# Altium PCB CAN2UART.PcbDoc
Units mm, origin at the board's own origin, x right, y up, seen from the top; angles counter-clockwise.
Board outline 70 x 30 mm, 2 copper layers (Top Layer, Bottom Layer); 34 components, 23 nets, 143 pads, 42 vias.
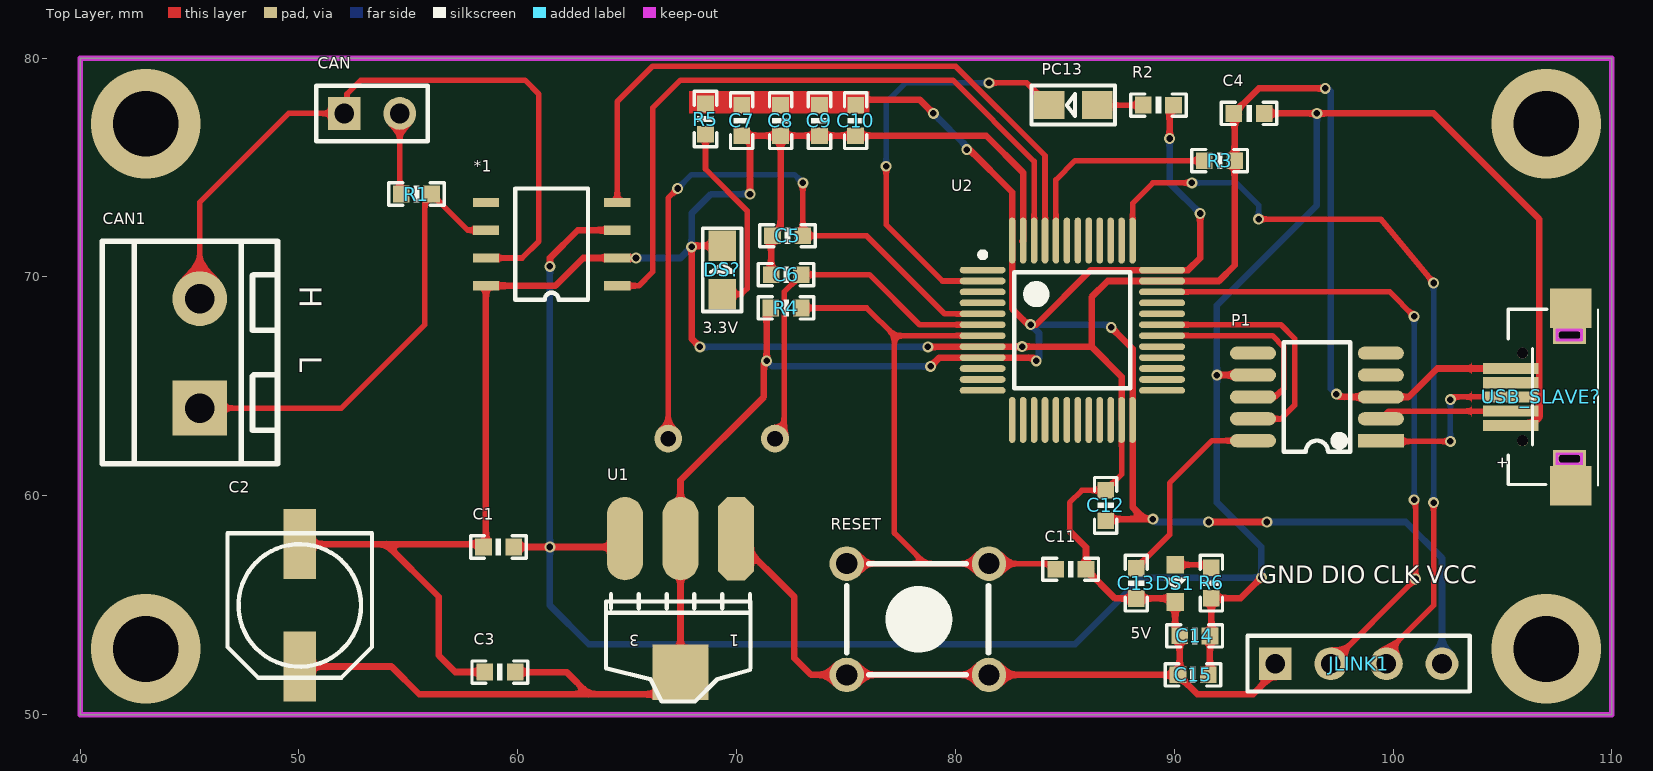
[diagram p0: Top Layer view]
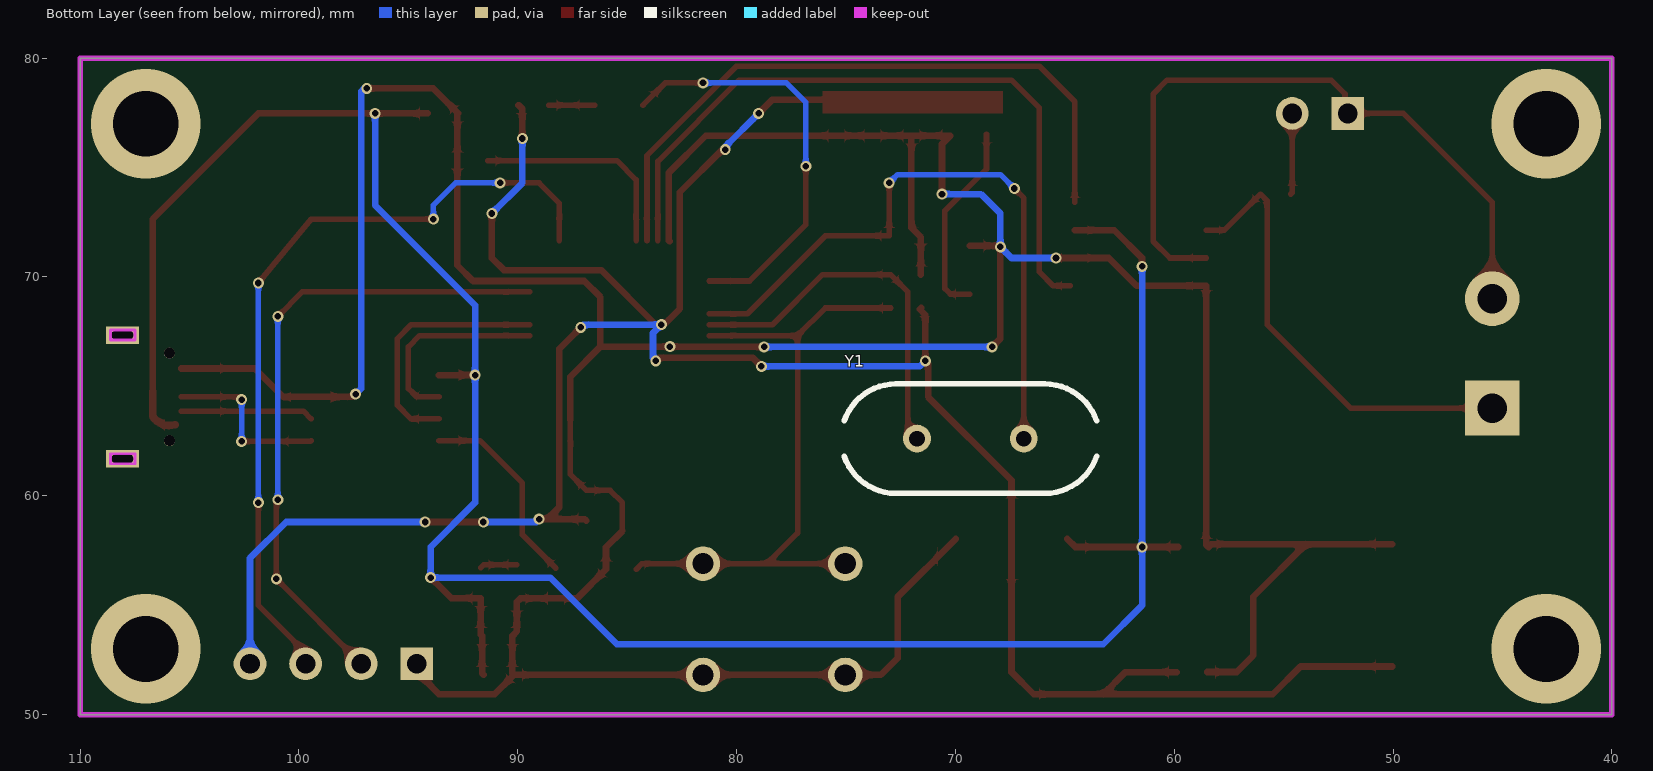
[diagram p1: Bottom Layer view, seen from below]

## Layer stack, top to bottom
Top Solder: solder mask 0.0102, Solder Resist, Dk 3.5
Top Layer: signal copper 0.0356
Dielectric 1: dielectric 0.32, FR-4, Dk 4.8
Bottom Layer: signal copper 0.0356
Bottom Solder: solder mask 0.0102, Solder Resist, Dk 3.5

## Board outline
40,50 40,80 110,80 110,50

## Design rules (kind name [scope] priority, off if disabled: settings)
Clearance [All] p1: gap=0.1
PolygonConnect [All] p1: connectstyle=Relief reliefconductorwidth=0.254 reliefentries=4 polygonreliefangle="90 Angle" airgapwidth=0.254
RoutingVias [All] p1: holewidth=0.711 width=1.27 viastyle="Through Hole" minholewidth=0.711 minwidth=1.27 maxholewidth=0.711 maxwidth=1.27
SolderMaskExpansion [All] p1: expansion=0.102
Width [All] p1: maxlimit=0.5 minlimit=0.254 preferedwidth=0.254
30 further rules are at their usual default settings.

## Classes and differential pairs
component class 5V_3.3V: C1 C2 C3 U1
component class CH340: C13 C14 C15 DS1 P1 R6 USB_SLAVE?
component class MIN-SYS: C5 C6 C7 C8 C9 C10 C11 C12 DS? JLINK1 PC13 R2 R3 R4 R5 RESET U2 Y1
component class TJA1050: *1 C4 CAN CAN1 R1

## Components (designator, comment, footprint, x,y, rotation, side; value= is the part's Value field where it differs from the comment)
*1 "TJA1050" SOP8 64.547,69.596 r180 top
C1 "104" 0603P 59.118,57.66 r0 top
C2 "220uF" CC6.56.5 50.038,54.991 r90 top
C3 "104" 0603P 59.182,51.945 r0 top
C4 "104" 0603P 93.421,77.47 r180 top
C5 "104" 0603P 72.326,71.884 r0 top
C6 "104" 0603P 72.263,70.104 r0 top
C7 "104" 0603P 70.231,77.14 r90 top
C8 "104" 0603P 72.009,77.14 r90 top
C9 "104" 0603P 73.787,77.14 r90 top
C10 "104" 0603P 75.438,77.14 r90 top
C11 "104" 0603P 85.268,56.642 r0 top
C12 "104" 0603P 86.868,59.563 r270 top
C13 "104" 0603P 88.265,56.007 r270 top
C14 "104" 0603P 90.932,53.596 r0 top
C15 "104" 0603P 90.856,51.816 r0 top
CAN "CAN_R" HDR1X2 52.07,77.47 r0 top
CAN1 "CAN" HEAD2L-0.8 45.466,64.008 r90 top
DS1 "CH340E_LED_Power" SMDLED-0603 90.043,56.845 r270 top
DS? "LED3.3V" SMDLED 69.34,69.214 r90 top
JLINK1 "Header 4" HDR1X4 94.615,52.324 r0 top
P1 "CH340E" SOP10 99.441,62.516 r180 top
PC13 "LED1" SMDLED 86.488,77.849 r180 top
R1 "120" 0603P 55.372,73.787 r180 top
R2 "1K" 0603P 89.281,77.851 r180 top
R3 "10K" 0603P 92.075,75.311 r180 top
R4 "10K" 0603P 72.263,68.58 r180 top
R5 "1K" 0603P 68.58,77.216 r270 top
R6 "1K" 0603P 91.694,56.007 r90 top
RESET "KEY_M" KEY_M 75.034,56.896 r0 top (schematic designator RESET?)
U1 "AMS1117-3.3" AMS1117 69.978,58.037 r180 top
U2 "STM32F103C8T6" LQFP48_M 85.344,67.564 r0 top
USB_SLAVE? "USB-B(Mini)" MICRO-USB 107.569,64.516 r90 top
Y1 "8MHz" XTAL_US 71.755,62.611 r180 bottom

## Footprints (in the part's own frame and the unit in brackets; to place one, negate y for a bottom-side part, rotate by r counter-clockwise, add the part's x,y. Pads: shape width x height; smd on the part's side, far side on the other; paste and mask are expansions set on the pad)
0603P [mil]
  rect 30x30 smd: 1(-27,0) 2(27.5,-0.06)
  silkscreen extent -50,-20 50,20
AMS1117 [mil]
  oct 65x150 smd: 1(0.03,-0.06)
  oval 65x150 smd: 2(100.03,-0.06) 3(200.03,-0.06)
  rect 100x100 smd: 4(100.03,239.94)
  silkscreen extent -26,100 234,293
CC6.56.5 [mm]
  rect 3.2x1.5 smd: 1(-2.794,0) 2(2.8,0)
  silkscreen extent -3.3,-3.3 3.3,3.3
HDR1X2 [mm]
  rect 1.5x1.5 hole 0.9: 1(0,0)
  round 1.5 hole 0.9: 2(2.54,0)
  silkscreen extent -1.27,-1.27 3.81,1.27
HDR1X4 [mm]
  rect 1.5x1.5 hole 0.9: 1(0,0)
  round 1.5 hole 0.9: 2(2.54,0) 3(5.08,0) 4(7.62,0)
  silkscreen extent -1.27,-1.27 8.89,1.27
HEAD2L-0.8 [mm]
  rect 2.5x2.5 hole 1.35: 1(0,0)
  round 2.5 hole 1.35: 2(5,0)
  silkscreen extent -2.54,-3.56 7.62,4.45
KEY_M [mil]
  round 62 hole 38: 1(0,0) 1(255.91,0) 2(0,-200) 2(255.91,-200)
  silkscreen extent 0,-200 255,0
LQFP48_M [mm] "Thin QFP, 48-Leads, Body 7x7mm, Pitch 0.5mm, IPC Low Density"
  oval 2.1x0.3 smd: 1(-4.1,2.75) 2(-4.1,2.25) 3(-4.1,1.75) 4(-4.1,1.25) 5(-4.1,0.75) 6(-4.1,0.25) 7(-4.1,-0.25) 8(-4.1,-0.75) 9(-4.1,-1.25) 10(-4.1,-1.75) 11(-4.1,-2.25) 12(-4.1,-2.75) 25(4.1,-2.75) 26(4.1,-2.25) 27(4.1,-1.75) 28(4.1,-1.25) 29(4.1,-0.75) 30(4.1,-0.25) 31(4.1,0.25) 32(4.1,0.75) 33(4.1,1.25) 34(4.1,1.75) 35(4.1,2.25) 36(4.1,2.75)
  oval 0.3x2.1 smd: 13(-2.75,-4.1) 14(-2.25,-4.1) 15(-1.75,-4.1) 16(-1.25,-4.1) 17(-0.75,-4.1) 18(-0.25,-4.1) 19(0.25,-4.1) 20(0.75,-4.1) 21(1.25,-4.1) 22(1.75,-4.1) 23(2.25,-4.1) 24(2.75,-4.1) 37(2.75,4.1) 38(2.25,4.1) 39(1.75,4.1) 40(1.25,4.1) 41(0.75,4.1) 42(0.25,4.1) 43(-0.25,4.1) 44(-0.75,4.1) 45(-1.25,4.1) 46(-1.75,4.1) 47(-2.25,4.1) 48(-2.75,4.1)
  silkscreen extent -4.22,-2.65 2.65,3.57, body extent -3.5,-3.5 3.5,3.5, height 1.6
MICRO-USB [mm]
  rect 0.508x2.54 smd: 1(-1.3,2.2) 2(-0.65,2.2) 3(0,2.2) 4(0.65,2.2) 5(1.3,2.2)
  rect 1.8x1.9 smd: 6(-4.05,-0.55) 6(4.05,-0.55)
  rect 0.8x1.5 hole 0.4 slot 1 at 90 deg: 6(-2.825,-0.5) 6(2.825,-0.5)
  round 0.5 hole 0.5 unplated: ""(-2,1.65) ""(2,1.65)
  Keep-Out Layer lines w0.127: -3.054,0.075 -2.596,0.075 -2.596,-1.043 -3.054,-1.043 -3.054,0.075 ; 2.596,0.075 3.054,0.075 3.054,-1.043 2.596,-1.043 2.596,0.075
  silkscreen extent -4.05,-1.8 4,2.3
SMDLED [mm]
  rect 1.4x1.27 smd: 1(0.001,-0.002) 2(2.211,-0.002)
  silkscreen extent -0.8,-0.89 3.01,0.89
SMDLED-0603 [mil]
  rect 32x32 smd: 1(0,0) 2(66.93,0)
  silkscreen extent 26,-17 42,17
SOP8 [mm]
  rect 1.2x0.42 smd: 1(0,0) 2(0,-1.27) 3(0,-2.54) 4(0,-3.81) 5(6,-3.81) 6(6,-2.54) 7(6,-1.27) 8(6,0)
  silkscreen extent 1.33,-4.44 4.67,0.64
SOP10 [mm]
  rect 2.1x0.6 smd: 1(0,0)
  oval 2.1x0.6 smd: 2(0,-1) 3(0,-2) 4(0,-3) 5(0,-4) 6(5.842,-4) 7(5.842,-3) 8(5.842,-2) 9(5.842,-1) 10(5.842,0)
  silkscreen extent 1.4,-4.5 4.45,0.5, body extent -0.21,-4.48 5.8,0.42, height 1.55
XTAL_US [mil]
  round 50 hole 28: 1(0,0) 2(192.13,0)
  silkscreen extent -131,-98 323,98

## Part data
C1 C3 C4 C5 C6 C7 C8 C9 C10 C11 C12 C13 C14 C15: library part C
C2: library part CAP
CAN: library part "Header 2", "Header, 2-Pin"
CAN1: library part HEAD2
DS1 DS? PC13: library part LED2, "Typical RED, GREEN, YELLOW, AMBER GaAs LED"
JLINK1: "Header, 4-Pin"
P1: library part "Header 5X2A", "Header, 5-Pin, Dual row"
R1 R2 R3 R4 R5 R6: library part R
U1: library part AMS1117
U2: "STM32 ARM-based 32-bit MCU with 64 Kbytes Flash, 48-pin LQFP, Industrial Temperature"
USB_SLAVE?: library part USB5
Y1: library part XTAL, "Crystal Oscillator"

## Via types
v1: diameter 0.5, hole 0.3, Top Layer to Bottom Layer, tented both sides, 38 vias
v2: diameter 5, hole 3, Top Layer to Bottom Layer, tented both sides, 4 vias

## Nets (pads, with @x,y where several pads share a name; then routed paths per layer and width w, separated by ;. In a path a pad name is that pad's centre, name@x,y a point inside that pad or via, vN(x,y) a via of type N, cw(c..) or ccw(c..) an arc to the next point about the centre after c; other vN are vias at no path point)
AMS1117-3.3_3.3VOUT: C2.1 C3.2 C7.2 C8.2 C9.2 C10.2 C12.2 JLINK1.4 R2.1 R4.2 R5.1 U1.2 U1.4 U2.9 U2.24 U2.36 U2.48 | length 121.3
  Top Layer w0.3: C2.1 54.229,52.197 55.499,50.927 63.246,50.927 ; C3.2 62.23,51.943 63.246,50.927 ; R4.2 71.628,68.518 71.374,68.264 v1(71.374,66.167) 71.247,66.04 71.247,64.516 67.437,60.706 U1.2 U1.4 66.421,50.927 63.246,50.927 ; C10.2 75.706,78.105 78.359,78.105 v1(78.994,77.47) ; v1(78.867,65.913) 79.268,66.314 U2.9 83.546,66.314 v1(83.693,66.167) ; v1(80.518,75.819) 80.645,75.819 82.594,73.87 U2.48 82.594,68.536 83.312,67.818 v1(83.439,67.818) 83.693,67.818 86.189,70.314 U2.36 90.634,70.314 91.186,70.866 v1(91.186,72.898) ; C12.2 86.93,58.928 88.646,58.928 ; v1(87.122,67.691) 88.094,66.719 U2.24 88.094,59.48 88.646,58.928 ; v1(89.027,58.928) 88.646,58.928 ; v1(89.789,76.327) 89.789,77.673 R2.1 ; v1(91.567,58.801) v1(94.234,58.801)
  Bottom Layer w0.3: v1(71.374,66.167) 71.628,65.913 v1(78.867,65.913) ; v1(78.994,77.47) 80.518,75.946 v1(80.518,75.819) ; v1(83.693,66.167) 83.82,66.294 83.82,67.437 v1(83.439,67.818) 86.995,67.818 v1(87.122,67.691) ; v1(89.027,58.928) 89.154,58.801 v1(91.567,58.801) ; v1(89.789,76.327) 89.789,74.295 v1(91.186,72.898) ; v1(94.234,58.801) 100.584,58.801 102.235,57.15 JLINK1.4
AMS1117-3.3_5VIN: *1.3 C1.2 C4.1 C14.2 C15.2 P1.7 R6.1 U1.3 USB_SLAVE?.1 | length 115.8
  Top Layer w0.3: C1.2 v1(61.468,57.658) 64.516,57.658 U1.3 ; v1(61.468,70.485) 61.468,70.866 62.738,72.136 *1.3 ; C15.2 91.631,51.891 C14.2 91.694,53.658 R6.1 93.04,55.321 v1(93.98,56.261) ; v1(91.948,65.516) P1.7 ; C4.1 v1(96.52,77.47) 101.854,77.47 106.68,72.644 106.68,64.781
  Top Layer w0.35: USB_SLAVE?.1@105.664,63.246 ccw(c105.918,64.114) 106.68,63.627 106.68,64.781
  Bottom Layer w0.3: v1(61.468,70.485) v1(61.468,57.658) 61.468,54.991 63.246,53.213 85.471,53.213 88.519,56.261 v1(93.98,56.261) 93.98,57.658 91.948,59.69 v1(91.948,65.516) 91.948,68.707 96.52,73.279 v1(96.52,77.47)
BOOT0: R3.2 U2.44 | length 9.9
  Top Layer w0.254: U2.44 84.594,74.434 85.473,75.313 R3.2
CAN_RX: *1.4 U2.45 | length 30.4
  Top Layer w0.254: *1.4 64.547,78.009 66.167,79.629 80.01,79.629 84.094,75.545 U2.45
CAN_TX: *1.1 U2.46 | length 32.3
  Top Layer w0.254: *1.1@64.746,69.596 65.532,69.596 66.167,70.231 66.167,77.724 67.437,78.994 79.883,78.994 83.594,75.283 U2.46
CANH: *1.7 CAN1.2 CAN.1 | length 32.4
  Top Layer w0.254: CAN1.2 45.466,73.406 49.53,77.47 CAN.1 52.197,77.597 52.197,78.359 52.832,78.994 60.325,78.994 60.96,78.359 60.96,71.628 60.198,70.866 *1.7
CANL: *1.6 CAN1.1 R1.1 | length 21.1
  Top Layer w0.254: CAN1.1 51.943,64.008 55.753,67.818 55.753,73.482 R1.1 57.709,72.136 *1.6
CH340E_D+: P1.1 USB_SLAVE?.3 | length 7.9
  Top Layer w0.254: P1.1 99.473,62.484 v1(102.616,62.484) ; v1(102.616,64.389) 102.743,64.516 USB_SLAVE?.3
  Bottom Layer w0.254: v1(102.616,62.484) v1(102.616,64.389)
CH340E_D-: P1.2 USB_SLAVE?.2 | length 6.1
  Top Layer w0.254: P1.2 99.791,63.866 USB_SLAVE?.2
CH340E_RXD: P1.9 U2.31 | length 11.5
  Top Layer w0.254: U2.31 94.873,67.814 95.504,67.183 95.504,64.135 94.885,63.516 P1.9
CH340E_TXD: P1.8 U2.30 | length 9.2
  Top Layer w0.254: U2.30 94.484,67.314 94.996,66.802 94.996,64.897 94.615,64.516 P1.8
GND: *1.2 *1.8 C1.1 C2.2 C3.1 C4.2 C5.1 C6.1 C7.1 C8.1 C9.1 C10.1 C11.2 C12.1 C13.2 C14.1 C15.1 DS1.2 DS?.2 JLINK1.1 P1.3 R3.1 RESET.2 U1.1 U2.8 U2.23 U2.35 U2.47 USB_SLAVE?.5 | length 188.4
  Top Layer w0.254: 85.217,58.395 85.217,59.69 85.776,60.249 C12.1 87.594,60.975 U2.23
  Top Layer w0.3: C2.2 53.98,57.791 ; C3.1 57.148,51.945 56.388,52.705 56.388,55.383 53.98,57.791 ; v1(65.405,70.866) *1.2 62.992,70.866 61.722,69.596 *1.8 58.547,57.774 C1.1 58.301,57.791 53.98,57.791 ; v1(68.326,66.802) 67.945,67.183 v1(67.945,71.374) 67.996,71.425 DS?.2 ; U1.1 72.644,55.372 72.644,52.578 73.406,51.816 75.034,51.816 81.534,51.816 C15.1 ; v1(70.612,73.787) 70.612,76.073 C7.1 C8.1 ; C6.1 71.577,71.82 C5.1 72.009,72.252 C8.1 ; v1(78.74,66.802) 81.232,66.802 U2.8 v1(83.046,66.814) 86.197,66.814 86.209,66.802 86.221,66.814 ; U2.47@83.058,71.628 U2.47 83.094,74.767 81.407,76.454 C10.1 C9.1 C8.1 ; 85.217,58.395 85.966,57.645 C11.2 87.298,55.309 C13.2 89.88,55.309 DS1.2 90.043,53.799 C14.1 90.246,51.892 C15.1 ; U2.23 87.594,65.441 86.221,66.814 ; JLINK1.1 94.615,51.943 93.599,50.927 91.059,50.927 C15.1 ; v1(96.901,78.613) 93.864,78.613 C4.2 92.761,77.434 R3.1 92.761,70.536 92.039,69.814 U2.35 86.959,69.814 86.221,69.076 86.221,66.814 ; v1(97.409,64.643) 97.536,64.516 P1.3 100.718,64.516 102.018,65.816 USB_SLAVE?.5
  Bottom Layer w0.3: v1(65.405,70.866) 67.437,70.866 v1(67.945,71.374) 67.945,72.898 68.834,73.787 v1(70.612,73.787) ; v1(68.326,66.802) 70.358,66.802 70.37,66.814 70.382,66.802 v1(78.74,66.802) ; v1(96.901,78.613) 97.028,78.613 97.155,78.486 97.155,64.897 v1(97.409,64.643)
NetC13_1: C13.1 P1.10 | length 9.1
  Top Layer w0.254: C13.1 89.789,58.217 89.789,60.579 91.726,62.516 P1.10
NetCAN_2: CAN.2 R1.2 | length 3.7
  Top Layer w0.254: CAN.2 54.61,73.852 R1.2
NetDS1_1: DS1.1 R6.2 | length 1.7
  Top Layer w0.254: DS1.1 91.556,56.845 R6.2
NetDS?_1: DS?.1 R5.2 | length 9.1
  Top Layer w0.254: R5.2 68.578,74.932 70.485,73.025 70.485,69.469 70.231,69.215 DS?.1
NetPC13_1: PC13.1 R2.2 | length 2.1
  Top Layer w0.254: PC13.1 88.581,77.851 R2.2
OSC_IN: C5.2 U2.5 Y1.2 | length 29.9
  Top Layer w0.254: Y1.2 66.875,73.606 v1(67.31,74.041) ; v1(73.025,74.295) C5.2 75.946,71.882 79.514,68.314 U2.5
  Bottom Layer w0.254: v1(67.31,74.041) 67.945,74.676 72.644,74.676 v1(73.025,74.295)
OSC_OUT: C6.2 U2.6 Y1.1 | length 17.2
  Top Layer w0.254: Y1.1 72.172,63.028 72.172,69.313 C6.2 76.075,70.102 78.363,67.814 U2.6
PC13: PC13.2 U2.2 | length 19.3
  Top Layer w0.254: v1(76.835,75.057) 76.835,72.39 79.411,69.814 U2.2 ; v1(81.534,78.867) 83.261,78.867 PC13.2
  Bottom Layer w0.254: v1(76.835,75.057) 76.835,77.978 77.724,78.867 v1(81.534,78.867)
RESET: C11.1 R4.1 RESET.1 U2.7 | length 29.5
  Top Layer w0.254: R4.1 75.946,68.58 77.212,67.314 ; RESET.1@75.034,56.896 78.613,56.896 ; U2.7 77.212,67.314 ; C11.1 84.328,56.896 81.534,56.896 78.613,56.896 ; 77.212,67.314 77.212,58.297 78.613,56.896
SWCLK: JLINK1.3 U2.37 | length 36.6
  Top Layer w0.254: U2.37 88.094,73.362 89.027,74.295 v1(90.805,74.295) ; v1(93.853,72.644) 99.441,72.644 v1(101.854,69.723) ; JLINK1.3 99.695,52.832 101.854,54.991 v1(101.854,59.69)
  Bottom Layer w0.254: v1(90.805,74.295) 92.837,74.295 93.853,73.279 v1(93.853,72.644) ; v1(101.854,59.69) v1(101.854,69.723)
SWDIO: JLINK1.2 U2.34 | length 29.5
  Top Layer w0.254: U2.34 99.85,69.314 v1(100.965,68.199) ; JLINK1.2 v1(101.028,56.197) 101.028,59.753 v1(100.965,59.817)
  Bottom Layer w0.254: v1(100.965,59.817) v1(100.965,68.199)
pads on no net: *1.5 P1.4 P1.5 P1.6 U2.1 U2.3 U2.4 U2.10 U2.11 U2.12 U2.13 U2.14 U2.15 U2.16 U2.17 U2.18 U2.19 U2.20 U2.21 U2.22 U2.25 U2.26 U2.27 U2.28 U2.29 U2.32 U2.33 U2.38 U2.39 U2.40 U2.41 U2.42 U2.43 USB_SLAVE?. USB_SLAVE?.4 USB_SLAVE?.6
copper on no net:
  other v2: 43,53 107,53 43,77 107,77

## Keep-outs
Keep-Out Layer:
  the board outline again, w0.254

## Other copper
Top Layer:
  rectangle net AMS1117-3.3_3.3VOUT: 67.818,77.47 76.073,78.486

## Silkscreen, mask and mechanical layers (free items; w line width, h text height)
Top Overlay:
  text "H     L" at 50.038,69.596 h1 r270
  text "3.3V" at 68.453,67.437 h0.52
  text "GND DIO CLK VCC" at 93.853,56.007 h0.8
  text "5V" at 88.011,53.467 h0.52

## Text inside footprints (layer, text, board x,y; h text height)
U1: Top Overlay "3" at 65.557,53.645 h0.52 r180; Top Overlay "1" at 70.129,53.645 h0.52 r180
USB_SLAVE?: Top Overlay "+" at 105.219,61.216 h0.52 r90